# Altium PCB buoys_pcb.PcbDoc
Units mm, origin at the board's own origin, x right, y up, seen from the top; angles counter-clockwise.
Board outline 69 x 56 mm, 2 copper layers (Top Layer, Bottom Layer); 76 components, 36 nets, 244 pads, 68 vias.
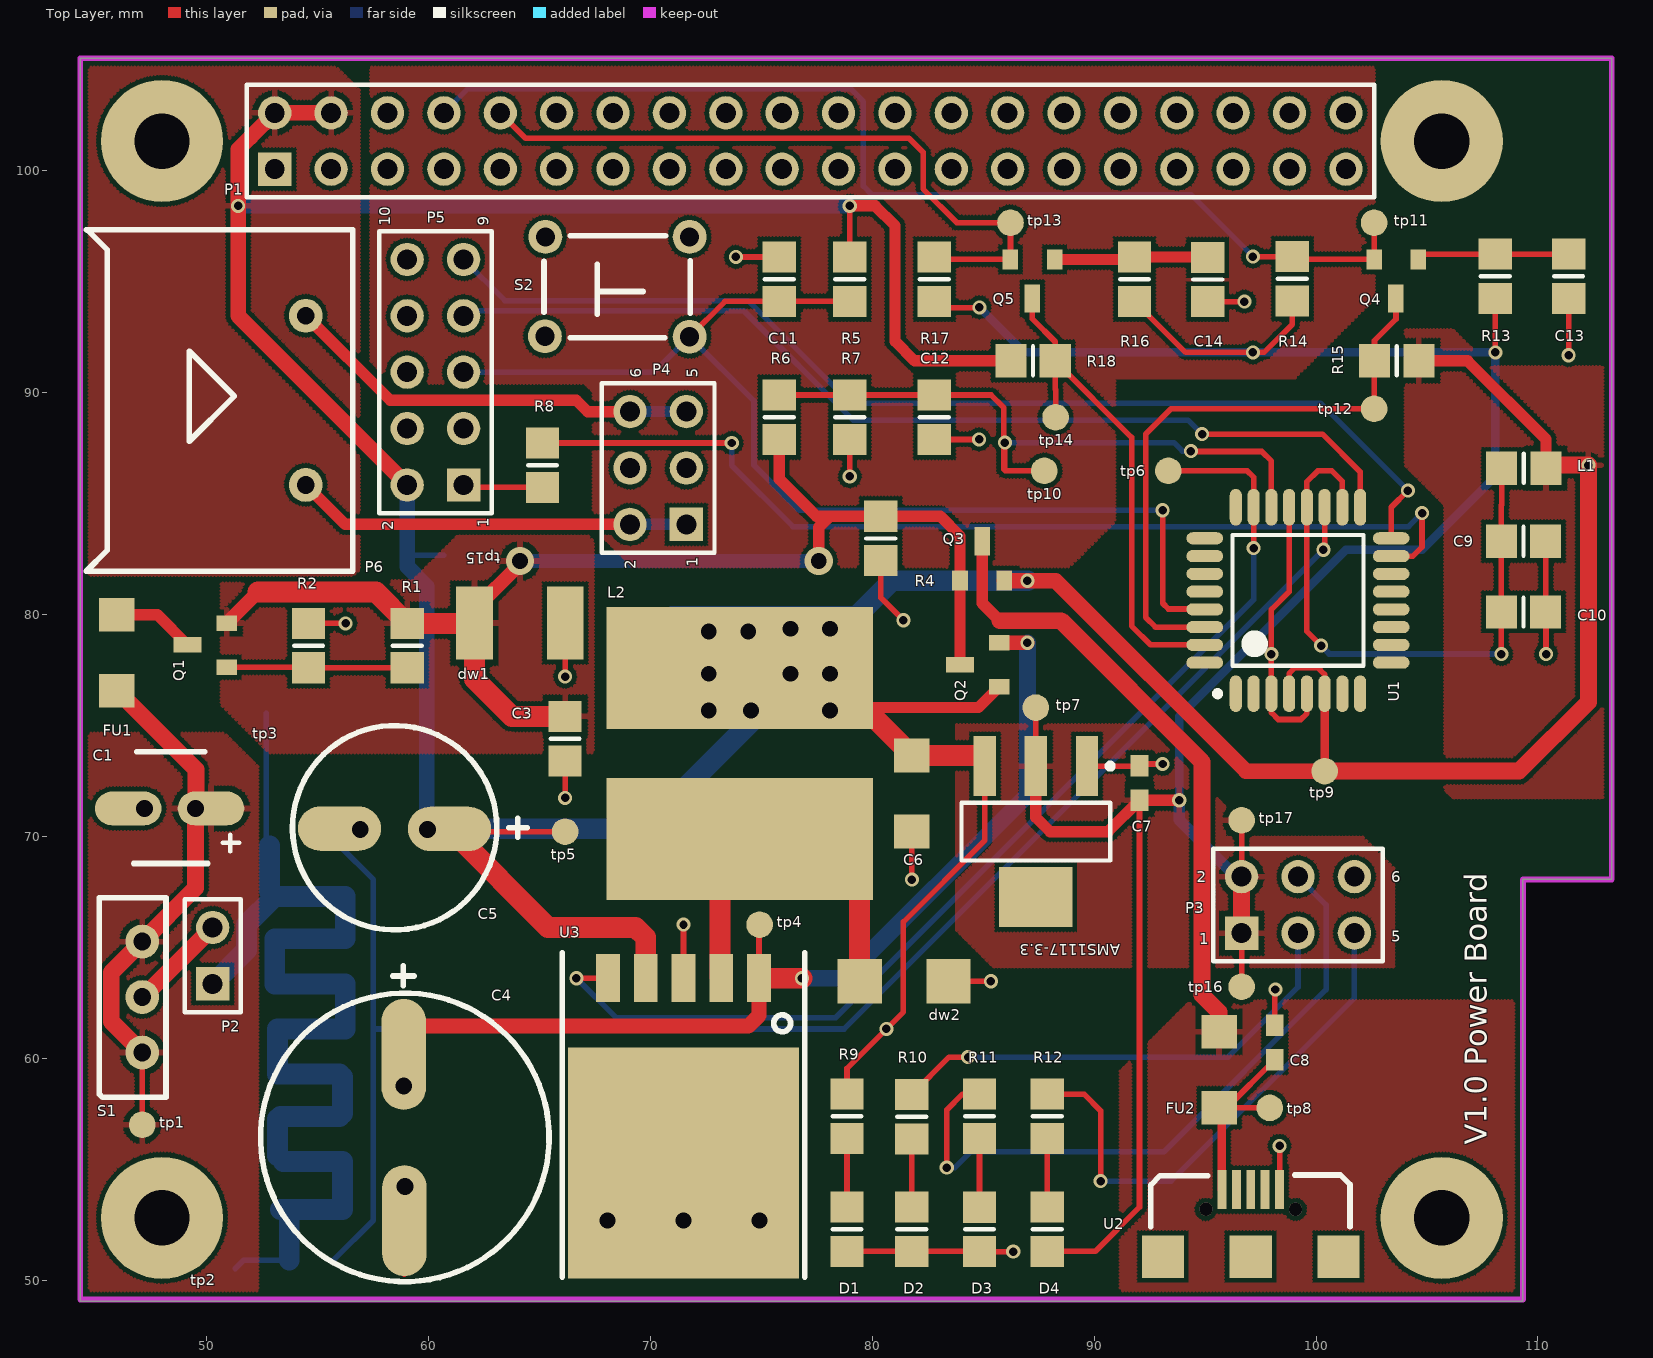
[diagram p0: Top Layer view]
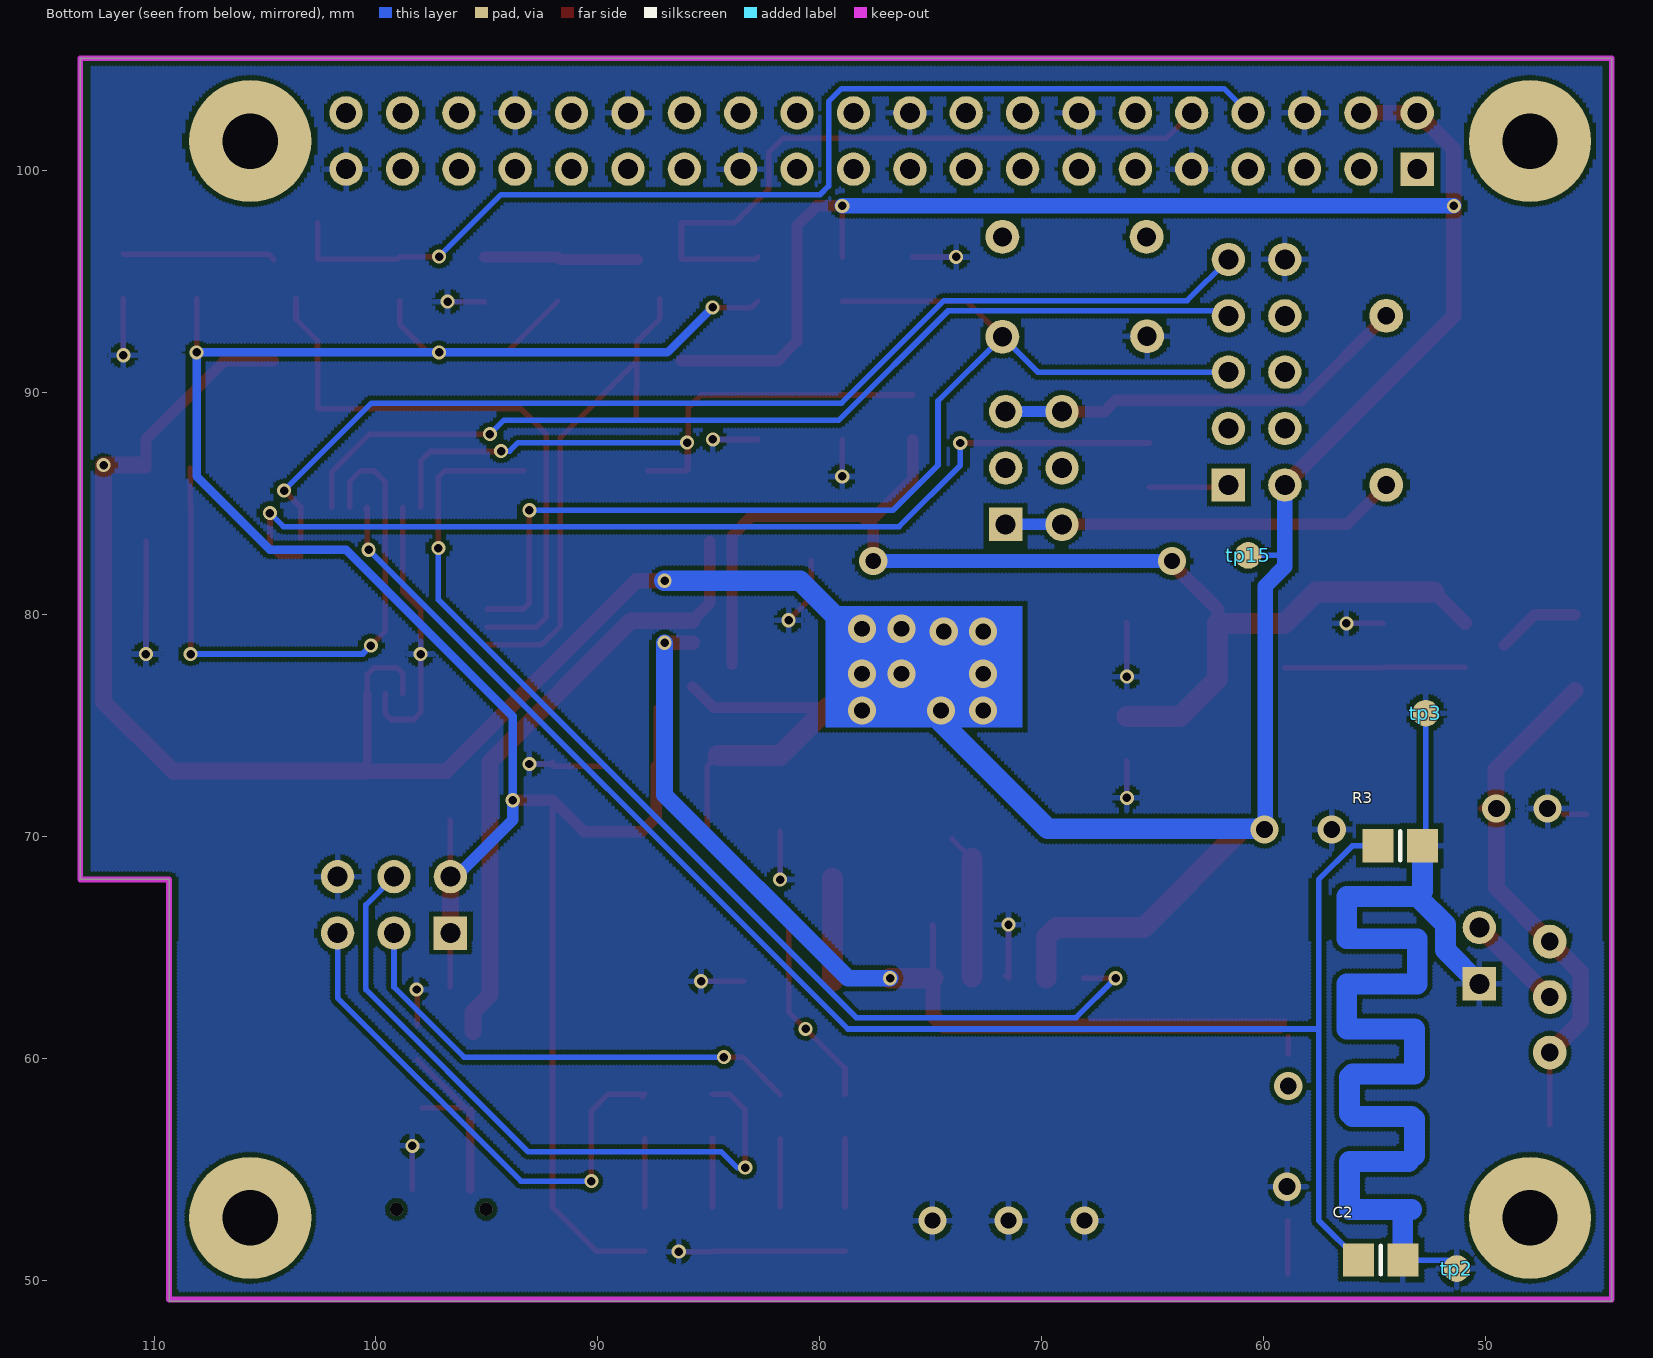
[diagram p1: Bottom Layer view, seen from below]

## Layer stack, top to bottom
Top Solder: solder mask 0.0102, Solder Resist, Dk 3.5
Top Layer: signal copper 0.0356
Dielectric 1: dielectric 0.32, FR-4, Dk 4.8
Bottom Layer: signal copper 0.0356
Bottom Solder: solder mask 0.0102, Solder Resist, Dk 3.5

## Board outline
44.323,49.075 109.323,49.075 109.323,68.075 113.323,68.075 113.323,105.075 44.323,105.075

## Design rules (kind name [scope] priority, off if disabled: settings)
Clearance [All] p1: gap=0.2
HoleToHoleClearance [All] p1: gap=0.2 allowstackedmicrovias=TRUE
PolygonConnect [All] p1: connectstyle=Relief reliefconductorwidth=0.254 reliefentries=4 polygonreliefangle="90 Angle" airgapwidth=0.254
RoutingVias [All] p1: holewidth=0.381 width=0.635 viastyle="Through Hole" minholewidth=0.381 minwidth=0.635 maxholewidth=0.635 maxwidth=1.27
SilkToSilkClearance [All] p1: silktosilkclearance=0.2
SolderMaskExpansion [All] p1: expansion=0.102
Width [All] p1: maxlimit=1 minlimit=0.2 preferedwidth=0.254
28 further rules are at their usual default settings.

## Components (designator, comment, footprint, x,y, rotation, side; value= is the part's Value field where it differs from the comment)
AMS1117-3.3 "Component_3" SOT223_M 87.376,70.231 r270 top
C1 "Cap Pol1" "5x5 C" 49.784,70.485 r180 top
C2 "Cap" 6-0805_M 54.737,50.927 r180 bottom
C3 "Cap" 6-0805_M 66.167,74.422 r270 top
C4 "Cap Pol2" "13x13 C" 55.858,63.065 r270 top locked
C5 "Cap Pol2" "8x8 C" 53.16,73.298 r180 top locked
C6 "Cap Pol2" 1206 81.818,73.71 r270 top
C7 "Cap Pol2" 0603 91.948,71.755 r90 top
C8 "Cap Pol2" 0603 98.044,60.071 r90 top
C9 "Cap" 6-0805_M 109.347,83.312 r180 top
C10 "Cap" 6-0805_M 109.347,80.122 r0 top
C11 "Cap" 6-0805_M 75.819,95.123 r90 top
C12 "Cap" 6-0805_M 82.804,88.9 r90 top
C13 "Cap" 6-0805_M 111.379,95.25 r90 top
C14 "Cap" 6-0805_M 95.123,95.107 r90 top
D1 "RED POWER" 6-0805_M 78.867,52.324 r270 top
D2 "RED" 6-0805_M 81.788,52.324 r270 top
D3 "BLUE" 6-0805_M 84.836,52.308 r270 top
D4 "ORANGE" 6-0805_M 87.884,52.324 r90 top
dw1 "SMBJ6.5A" SMBJ6.5A 66.237,79.589 r180 top
dw2 "1N5824" 1N5824 83.439,63.5 r180 top
FU1 "FUSE 3A" 1206 45.944,76.531 r90 top
FU2 "FUSE 3A" 1206 95.601,57.744 r90 top
L1 "Inductor" 6-0805_M 109.363,86.599 r0 top
L2 "Inductor" "12x12 L" 67.251,80.177 r90 top locked
P1 "Header 20X2" HDR2X20 53.086,100.076 r0 top locked
P2 "Header 2" HDR1X2 50.292,63.373 r90 top
P3 "Header 3X2" HDR2X3 96.647,65.659 r0 top locked
P4 "Header 3X2" HDR2X3 71.628,84.074 r90 top locked
P5 "Header 5X2" HDR2X5 61.595,85.852 r90 top locked
P6 "Header 2" tether 54.483,93.472 r270 top locked
Q1 "A19T" A19T 49.152,78.635 r90 top
Q2 "A19T" A19T 83.95,77.746 r90 top
Q3 "A19T" A19T 84.953,83.322 r0 top
Q4 "2N7002" 2N7002 95.69,211.847 r180 top
Q5 "2N7002" 2N7002 79.307,211.847 r180 top
R1 "Res1" 6-0805_M 59.055,78.613 r270 top
R2 "Res1" 6-0805_M 54.61,78.613 r270 top
R3 "Res1" 6-0805_M 53.848,69.596 r180 bottom
R4 "Res1" 6-0805_M 80.391,83.439 r90 top
R5 "Res1" 6-0805_M 78.994,95.123 r90 top
R6 "Res1" 6-0805_M 75.819,88.9 r270 top
R7 "Res1" 6-0805_M 78.994,88.9 r90 top
R8 "Res1" 6-0805_M 65.151,86.741 r90 top
R9 "Res1" 6-0805_M 78.867,57.404 r90 top
R10 "Res1" 6-0805_M 81.788,57.388 r90 top
R11 "Res1" 6-0805_M 84.836,57.404 r90 top
R12 "Res1" 6-0805_M 87.884,57.404 r90 top
R13 "Res1" 6-0805_M 108.077,95.25 r270 top
R14 "Res1" 6-0805_M 98.933,95.139 r270 top
R15 "Res1" 6-0805_M 103.632,91.44 r0 top
R16 "Res1" 6-0805_M 91.821,95.123 r270 top
R17 "Res1" 6-0805_M 82.804,95.123 r270 top
R18 "Res1" 6-0805_M 87.249,91.44 r180 top
S1 "sw" switch-2 47.117,65.288 r270 top
S2 "SW-PB" switch4 71.788,96.998 r180 top
tp1 "testpoint" tp#1 47.117,57.023 r0 top
tp2 "testpoint" tp#2 51.308,50.546 r0 top
tp3 "testpoint" tp#2 52.705,75.565 r0 top
tp4 "testpoint" tp#1 74.93,66.04 r90 top
tp5 "testpoint" tp#1 66.167,70.231 r0 top
tp6 "testpoint" tp#1 93.345,86.487 r0 top
tp7 "testpoint" tp#1 87.376,75.819 r90 top
tp8 "testpoint" tp#1 97.917,57.785 r0 top
tp9 "testpoint" tp#1 100.387,72.955 r0 top
tp10 "testpoint" tp#1 87.757,86.487 r90 top
tp11 "testpoint" tp#1 102.616,97.663 r90 top
tp12 "testpoint" tp#1 102.616,89.281 r90 top
tp13 "testpoint" tp#1 86.233,97.663 r90 top
tp14 "testpoint" tp#1 88.265,88.9 r90 top
tp15 "testpoint" tp#2 60.706,82.677 r270 top
tp16 "testpoint" tp#1 96.647,63.246 r90 top
tp17 "testpoint" tp#1 96.647,70.739 r90 top
U1 "ATmega8A-AU" 32A_N 99.187,80.645 r90 top locked
U2 "microUSB" microUSB 95.758,54.102 r0 top locked
U3 "LM2596S-5" LM2596 71.501,61.595 r90 top locked

## Footprints (in the part's own frame and the unit in brackets; to place one, negate y for a bottom-side part, rotate by r counter-clockwise, add the part's x,y. Pads: shape width x height; smd on the part's side, far side on the other; paste and mask are expansions set on the pad)
1N5824 [mm]
  rect 2x2 smd: A(0,0.01) K(4,0.01)
2N7002 [mm]
  rect 0.7x0.915 smd: 1(-8.914,115.837) 3(-6.926,115.835)
  rect 0.7x1.27 smd: 2(-7.91,117.6)
"5x5 C" [mm]
  oval 3x1.524 smd: 1(-0.43,-0.79) 2(3.3,-0.79)
  silkscreen extent -1.7,-3.35 3.05,1.69
6-0805_M [mm] "Chip Resistor, Body 2.0x1.2mm, IPC Low Density"
  rect 1.4x1.5 smd: 1(-1,0) 2(1,0)
  silkscreen extent 0,-0.65 0,0.65, body extent -1.07,-0.7 1.07,0.7, height 0.7
"8x8 C" [mm]
  oval 3.75x2 smd: 1(-7.8,2.94) 2(-2.84,2.93)
  silkscreen extent -11.3,-1.71 -0.73,7.49
"12x12 L" [mm]
  rect 5.5x12 smd: 1(-10.27,-6.79) 2(-2.58,-6.79)
"13x13 C" [mm]
  oval 5x2 smd: 1(2.87,3.04) 2(10.36,3.07)
  silkscreen extent -1.13,-3.41 13.11,9.59
32A_N [mm] "Thin QFP, 32-Leads, Body 7x7mm, Pitch 0.8mm, IPC Medium Density"
  oval 1.65x0.55 smd: 1(-4.2,2.8) 2(-4.2,2) 3(-4.2,1.2) 4(-4.2,0.4) 5(-4.2,-0.4) 6(-4.2,-1.2) 7(-4.2,-2) 8(-4.2,-2.8) 17(4.2,-2.8) 18(4.2,-2) 19(4.2,-1.2) 20(4.2,-0.4) 21(4.2,0.4) 22(4.2,1.2) 23(4.2,2) 24(4.2,2.8)
  oval 0.55x1.65 smd: 9(-2.8,-4.2) 10(-2,-4.2) 11(-1.2,-4.2) 12(-0.4,-4.2) 13(0.4,-4.2) 14(1.2,-4.2) 15(2,-4.2) 16(2.8,-4.2) 25(2.8,4.2) 26(2,4.2) 27(1.2,4.2) 28(0.4,4.2) 29(-0.4,4.2) 30(-1.2,4.2) 31(-2,4.2) 32(-2.8,4.2)
  silkscreen extent -4.32,-2.95 2.95,3.75, body extent -3.5,-3.5 3.5,3.5, height 1.2
0603 [mm]
  rect 0.965x0.8 smd: 1(-0.11,-0.1) 2(1.445,-0.1)
1206 [mm]
  rect 1.52x1.6 smd: 1(0.05,-0.03) 2(3.47,-0.03)
A19T [mm]
  rect 0.7x0.915 smd: 1(-0.994,-1.773) 3(0.994,-1.775)
  rect 0.7x1.27 smd: 2(0.01,-0.01)
HDR1X2 [mm] "Connector; Header; 2 Position"
  rect 1.5x1.5 hole 0.9: 1(0,0)
  round 1.5 hole 0.9: 2(2.54,0)
  silkscreen extent -1.27,-1.27 3.81,1.27
HDR2X3 [mm] "Connector; Header; 3x2 Position"
  rect 1.5x1.5 hole 0.9: 1(0,0)
  round 1.5 hole 0.9: 2(0,2.54) 3(2.54,0) 4(2.54,2.54) 5(5.08,0) 6(5.08,2.54)
  silkscreen extent -1.27,-1.27 6.35,3.81
HDR2X5 [mm] "Connector; Header; 5x2 Position"
  rect 1.5x1.5 hole 0.9: 1(0,0)
  round 1.5 hole 0.9: 2(0,2.54) 3(2.54,0) 4(2.54,2.54) 5(5.08,0) 6(5.08,2.54) 7(7.62,0) 8(7.62,2.54) 9(10.16,0) 10(10.16,2.54)
  silkscreen extent -1.27,-1.27 11.43,3.81
HDR2X20 [mm] "Connector; Header; 20x2 Position"
  rect 1.5x1.5 hole 0.9: 1(0,0)
  round 1.5 hole 0.9: 2(0,2.54) 3(2.54,0) 4(2.54,2.54) 5(5.08,0) 6(5.08,2.54) 7(7.62,0) 8(7.62,2.54) 9(10.16,0) 10(10.16,2.54) 11(12.7,0) 12(12.7,2.54) 13(15.24,0) 14(15.24,2.54) 15(17.78,0) 16(17.78,2.54) 17(20.32,0) 18(20.32,2.54) 19(22.86,0) 20(22.86,2.54) 21(25.4,0) 22(25.4,2.54) 23(27.94,0) 24(27.94,2.54) 25(30.48,0) 26(30.48,2.54) 27(33.02,0) 28(33.02,2.54) 29(35.56,0) 30(35.56,2.54) 31(38.1,0) 32(38.1,2.54) 33(40.64,0) 34(40.64,2.54) 35(43.18,0) 36(43.18,2.54) 37(45.72,0) 38(45.72,2.54) 39(48.26,0) 40(48.26,2.54)
  silkscreen extent -1.27,-1.27 49.53,3.81
LM2596 [mm]
  rect 2.16x1.07 smd: 1(2.032,-3.4) 2(2.032,-1.7) 3(2.032,0) 3(2.032,0) 4(2.032,1.7) 5(2.032,3.4)
  rect 10.41x10.41 smd: 6(-6.298,0)
  silkscreen extent -11.43,-5.46 3.18,5.46
microUSB [mm]
  rect 0.4x1.75 smd: 1(0,0) 2(0.65,0) 3(1.3,0) 4(1.95,0) 5(2.6,0)
  rect 1.9x1.9 smd: 6(-2.65,-3.025) 7(1.3,-3.025) 8(5.25,-3.025)
  silkscreen extent -3.2,-1.68 5.77,0.66
SMBJ6.5A [mm]
  rect 1.65x3.3 smd: A(0.07,-0.04) K(4.15,-0.04)
SOT223_M [mm] "SOT223, 4-Leads, Body 6.5x3.5mm, Pitch 2.3mm, Lead Span 7mm, IPC Low Density"
  rect 2.7x1 smd: 1(-2.95,2.3) 2(-2.95,0) 3(-2.95,-2.3)
  rect 2.7x3.3 smd: 4(2.95,0)
  silkscreen extent -3.07,-3.35 1.3,3.48, body extent -1.85,-3.35 1.85,3.35, height 1.7
switch4 [mm]
  round 1.524 hole 0.862: 1(0.01,4.47) 2(6.53,4.45) 3(0.01,-0.03) 4(6.51,-0.03)
  silkscreen extent -0.02,-0.08 6.57,4.51
switch-2 [mil]
  round 60 hole 31.5: 1(98.82,0) 2(0.39,0) 3(197.24,0)
  silkscreen extent -78,-76 277,42
tether [mil]
  round 60 hole 31.5: 1(0,0) 2(300,0)
  silkscreen extent -153,-389 453,83
tp#1 [mm]
  round 1.2 smd: 1(0,0)
tp#2 [mm]
  round 1.2 smd far side: 1(0,0)

## Part data
C1: "Polarized Capacitor (Radial)"
C2 C3 C9 C10 C11 C12 C13 C14: "Capacitor"
C4 C5 C6 C7 C8: "Polarized Capacitor (Axial)"
D1 D2 D3 D4: library part LED2, "Typical RED, GREEN, YELLOW, AMBER GaAs LED"
dw1 dw2: library part DW
FU1 FU2: library part FUSE
P1: "Header, 20-Pin, Dual row"
P2 P6: "Header, 2-Pin"
P3 P4: "Header, 3-Pin, Dual row"
P5: "Header, 5-Pin, Dual row"
Q1 Q2 Q3: library part PMOS-2, "P-Channel Power MOSFET"
Q4 Q5: library part NMOS-2, "N-Channel Power MOSFET"
R1 R2 R3 R4 R5 R6 R7 R8 R9 R10 R11 R12 R13 R14 R15 R16 R17 R18: "Resistor"
S2: "Switch"
U1: "8-bit AVR Microcontroller, 2.7-5.5V, 16MHz, 8KB Flash, 512 Bytes EEPROM, 1KB SRAM, 32-pin TQFP, Industrial Grade (-40癈 to 85癈)"
U2: library part Component_1
U3: library part Component_2

## Free pads (board coordinates)
  round 5.5 hole 2.5: 0(48.006,101.346) 1(105.664,101.346) 2(105.664,52.832) 3(48.006,52.832)

## Via types
v1: diameter 0.635, hole 0.381, Top Layer to Bottom Layer, 45 vias
v2: diameter 1.27, hole 0.711, Top Layer to Bottom Layer, 15 vias
v3: diameter 1.27, hole 0.762, Top Layer to Bottom Layer, 6 vias
v4: diameter 0.6, hole 0.6, Top Layer to Bottom Layer, 2 vias

## Nets (pads, with @x,y where several pads share a name; then routed paths per layer and width w, separated by ;. In a path a pad name is that pad's centre, name@x,y a point inside that pad or via, vN(x,y) a via of type N, cw(c..) or ccw(c..) an arc to the next point about the centre after c; other vN are vias at no path point)
+5V: AMS1117-3.3.3 C5.1 C6.1 L1.2 L2.2 P1.2 P1.4 P5.2 Q2.1 Q3.3 R5.2 R9.2 R15.2 R18.2 tp5.1 tp9.1 tp15.1 U1.4 U1.6 U3.4 | length 224.5
  Top Layer w0.254: C5.1 61.087,70.231 tp5.1 ; L2.2@78.105,75.819 L2.2@79.629,75.819 ; R9.2 78.867,59.563 v1(80.645,61.341) 81.407,62.103 81.407,66.167 85.076,69.836 AMS1117-3.3.3 AMS1117-3.3.3@84.597,73.66 ; R5.2 v1(78.994,98.425) ; Q3.3 Q3.3@85.96,81.534 ; U1.4 98.787,77.349 99.06,77.622 100.076,77.622 100.387,77.311 U1.6 ; L1.2 L1.2@110.505,86.741
  Top Layer w0.381: tp9.1 U1.6
  Top Layer w0.508: v1(78.994,98.425) 80.137,98.425 81.026,97.536 81.026,92.329 81.915,91.44 R18.2 ; L2.2@79.629,75.819 84.79,75.819 Q2.1 ; R15.2 106.832,91.44 110.363,87.909 L1.2
  Top Layer w0.7: P1.4 P1.2 51.994,101.524 51.435,100.965 v1(51.435,98.425) 51.435,93.472 P5.2 ; Q3.3@85.96,81.534 v1(86.995,81.534) 88.265,81.534 96.844,72.955
  Top Layer w0.711: 96.844,72.955 tp9.1
  Top Layer w0.762: tp9.1 109.15,72.955 112.268,76.073 v1(112.268,86.741) L1.2@110.505,86.741
  Top Layer w0.94: C5.1@61.087,70.231 65.405,65.913 69.342,65.913 69.801,65.454 U3.4 ; L2.2@79.629,75.819 C6.1 AMS1117-3.3.3@84.597,73.66
  Bottom Layer w0.254: 59.055,82.677 tp15.1
  Bottom Layer w0.7: v1(51.435,98.425) v1(78.994,98.425) ; P5.2 59.055,82.677 59.055,82.169 59.944,81.28 v3@59.944,70.358
  Bottom Layer w0.94: v3@59.944,70.358 69.723,70.358 80.899,81.534 v1(86.995,81.534)
  other v2: 72.644,75.692 74.549,75.692 78.105,75.692 72.644,77.343 76.327,77.343 78.105,77.343 72.644,79.248 74.422,79.248 76.327,79.375 78.105,79.375
  other v3: 59.97,70.328
+V3.3: AMS1117-3.3.2 C7.1 D4.1 P3.1 P3.2 R13.2 R14.2 R16.2 R17.2 tp7.1 tp16.1 tp17.1 | length 114.9
  Top Layer w0.254: R17.2 83.09,93.837 84.836,93.837 v1(84.836,93.853) ; AMS1117-3.3.2 tp7.1 ; D4.1 90.059,51.324 92.048,53.313 C7.1 ; R16.2 94.123,91.821 v1(97.155,91.821) 97.663,91.821 98.933,93.091 R14.2 ; tp16.1 P3.1 ; P3.2 tp17.1 ; v1(108.077,91.821) R13.2
  Top Layer w0.508: AMS1117-3.3.2 87.376,70.866 88.011,70.231 90.634,70.231 C7.1 v1(93.836,71.645)
  Top Layer w0.762: P3.1 P3.2
  Bottom Layer w0.254: P3.2@96.393,68.199 P3.2 P3.2@96.647,68.834
  Bottom Layer w0.381: v1(84.836,93.853) 86.868,91.821 v1(97.155,91.821) v1(108.077,91.821) 108.077,86.233 104.775,82.931 101.346,82.931 93.836,75.421 v1(93.836,71.645)
  Bottom Layer w0.508: v1(93.836,71.645) 93.836,70.756 P3.2@96.393,68.199
AVR_RX: Q4.2 R15.1 tp12.1 U1.30 | length 27.2
  Top Layer w0.254: U1.30 92.767,79.445 92.329,79.883 92.329,88.138 93.472,89.281 tp12.1 102.616,91.424 R15.1 102.632,92.354 103.6,93.323 Q4.2
AVR_TX: Q5.2 R18.1 tp14.1 U1.31 | length 22.8
  Top Layer w0.254: Q5.2 87.217,93.335 88.249,92.304 R18.1 ; tp14.1 88.265,90.145 88.249,90.161 R18.1 ; U1.31 92.551,78.645 91.694,79.502 91.694,87.995 R18.1
BCURRENT: C2.1 R3.1 U1.19 | length 75
  Top Layer w0.254: v1(100.33,82.931) 100.387,82.988 U1.19 U1.19@100.457,84.775
  Bottom Layer w0.254: R3.1 56.007,69.596 57.531,68.072 57.531,61.341 ; C2.1 57.531,52.721 57.531,61.341 ; v1(100.33,82.931) 78.74,61.341 57.531,61.341
GND: AMS1117-3.3.1 C1.2 C2.2 C3.2 C4.2 C5.2 C6.2 C7.2 C8.2 C9.1 C10.2 C11.2 C12.1 C13.1 C14.1 D1.2 D2.2 D3.2 dw1.A dw2.A P1.6 P1.9 P1.14 P1.20 P1.25 P1.30 P1.34 P1.39 P2.1 P3.6 P5.10 R2.1 R3.2 R4.1 R7.1 S2.2 tp2.1 tp3.1 U1.3 U1.5 U1.21 U2.5 U3.3 U3.6 | length 117.3
  Top Layer w0.254: C1.2@45.466,71.021 C1.2@46.484,71.021 ; R2.1 v1(56.277,79.613) ; C4.2@58.928,50.292 C4.2 ; C3.2 66.167,71.787 v1@66.199,71.755 ; v1(66.167,77.216) dw1.A ; v1(71.501,66.04) 71.501,63.627 U3.3@71.614,63.74 ; v1(73.858,96.123) C11.2 ; D1.2 D2.2 84.82,51.324 D3.2 v1(86.36,51.308) ; v1(78.994,86.233) R7.1 ; R4.1 80.391,80.772 v1(81.407,79.756) ; v1(81.788,68.072) C6.2 ; C12.1 v1(84.82,87.9) ; dw2.A v1(85.354,63.49) ; AMS1117-3.3.1 92.029,73.181 C7.2 92.048,73.379 92.148,73.279 v1(93.091,73.279) ; C14.1 v1(96.774,94.107) ; C8.2 98.144,63.092 v1(98.171,63.119) ; U2.5 v1(98.358,56.074) ; U1.21 98.787,81.039 97.987,80.239 v1(97.987,78.232) U1.3 97.987,75.597 98.298,75.286 99.314,75.286 99.587,75.559 U1.5 ; C9.1 C10.2 110.363,80.106 v1(110.363,78.232) ; v1(111.379,91.694) C13.1
  Bottom Layer w0.254: tp2.1 51.689,50.927 C2.2 ; tp3.1 52.705,69.739 R3.2 ; 52.848,67.548 53.086,67.31 ; 53.213,55.626 53.467,55.372 ; 53.213,57.277 53.34,57.404 ; 53.34,53.213 53.737,52.816 ; 56.007,57.404 56.134,57.531 ; 56.007,59.309 56.134,59.182
  Bottom Layer w0.94: P2.1 51.816,64.897 51.816,66.04 53.086,67.31 56.261,67.31 56.261,65.405 53.086,65.405 53.086,63.373 56.261,63.373 56.261,61.341 53.213,61.341 53.213,59.309 56.007,59.309 ; 52.848,67.548 R3.2 ; 53.213,55.626 53.213,57.277 ; 53.34,53.213 56.134,53.213 56.134,55.372 53.467,55.372 ; 53.34,57.404 56.007,57.404 ; C2.2 53.737,52.816 ; 56.134,57.531 56.134,59.182
  other v1: 66.167,71.755
  other v2: 68.072,52.705 71.501,52.705 74.93,52.705
  other v3: 58.948,54.235 56.94,70.328 47.214,71.275
MISO: P5.9 U1.16 | length 49.3
  Top Layer w0.254: U1.16 103.387,84.845 v1(104.14,85.598)
  Bottom Layer w0.254: P5.9 63.452,94.155 74.407,94.155 79.026,89.535 100.203,89.535 v1(104.14,85.598)
MOSI: R8.2 U1.15 | length 45.1
  Top Layer w0.254: R8.2 v1(73.676,87.741) ; U1.15 104.362,82.645 104.775,83.058 v1(104.775,84.582)
  Bottom Layer w0.254: v1(73.676,87.741) 73.676,86.725 76.429,83.972 104.165,83.972 v1(104.775,84.582)
NetC8_1: C8.1 FU2.1 tp8.1 U2.1 | length 8.8
  Top Layer w0.254: FU2.1@95.758,57.667 95.85,57.667 FU2.1@95.977,57.794 ; tp8.1 97.908,57.794 FU2.1@95.977,57.794 ; C8.1 FU2.1@95.977,57.794
  Top Layer w0.381: U2.1 FU2.1@95.758,57.667
NetC9_2: C9.2 C10.1 L1.1 U1.18 U1.20 | length 27.5
  Top Layer w0.254: v1(100.228,78.613) 99.587,79.254 U1.20 99.587,85.998 100.076,86.487 100.711,86.487 101.187,86.011 U1.18 ; v1(108.347,78.232) C10.1 C9.2 108.347,84.938 108.363,84.954 L1.1
  Bottom Layer w0.254: v1(100.228,78.613) 100.597,78.245 100.584,78.232 v1(108.347,78.232)
NetC13_2: C13.2 Q4.1 R13.1 | length 6.9
  Top Layer w0.254: Q4.1 104.845,96.25 R13.1 C13.2
NetC14_2: C14.2 Q5.1 R16.1 | length 7
  Top Layer w0.254: R16.1@91.708,96.01 R16.1 ; C14.2@95.107,96.123 C14.2
  Top Layer w0.5: Q5.1 R16.1@91.708,96.01 ; R16.1 C14.2@95.107,96.123
NetD1_1: D1.1 R9.1 | length 3.1
  Top Layer w0.254: D1.1 R9.1
NetD2_1: D2.1 R10.1 | length 3.1
  Top Layer w0.254: D2.1 R10.1
NetD3_1: D3.1 R11.1 | length 3.1
  Top Layer w0.254: D3.1 R11.1
NetD4_2: D4.2 R12.1 | length 3.1
  Top Layer w0.254: D4.2 R12.1
Netdw2_K: dw2.K L2.1 U3.2 | length 11.3
  Top Layer w0.254: U3.2@73.152,63.676 U3.2 ; L2.1@73.152,69.018 L2.1
  Top Layer w0.94: U3.2@73.152,63.676 L2.1@73.152,69.018 ; dw2.K L2.1@79.439,68.136
NetFU1_2: FU1.2 Q1.2 | length 3.7
  Top Layer w0.508: FU1.2 47.806,80.001 Q1.2
NetP2_2: P2.2 S1.1 | length 4.5
  Top Layer w0.254: S1.1 S1.1@47.157,62.778
  Top Layer w0.762: S1.1@47.157,62.778 P2.2
NetP3_5: P3.5 R12.2 | length 23.8
  Top Layer w0.254: R12.2@87.995,58.293 R12.2 89.551,58.404 90.297,57.658 v1(90.297,54.483)
  Bottom Layer w0.254: v1(90.297,54.483) 93.472,54.483 101.727,62.738 P3.5
NetP5_1: P5.1 R8.1 | length 3.6
  Top Layer w0.254: P5.1 61.706,85.741 R8.1
NetQ1_1: Q1.1 R1.2 R2.2 | length 8.1
  Top Layer w0.254: Q1.1 54.582,77.641 R2.2 R1.2
PI_RX: P1.10 Q5.3 R17.1 tp13.1 | length 31.1
  Top Layer w0.254: P1.10 64.389,101.473 81.661,101.473 82.296,100.838 82.296,99.187 83.82,97.663 tp13.1 Q5.3 82.915,96.012 R17.1
PI_TX: P1.8 Q4.3 R14.1 tp11.1 | length 49.4
  Top Layer w0.254: v1(97.155,96.139) R14.1 99.06,96.012 Q4.3 tp11.1
  Bottom Layer w0.254: P1.8 61.798,103.708 79.019,103.708 79.604,103.124 79.604,99.314 79.985,98.933 94.361,98.933 v1(97.155,96.139)
PLC: P3.3 R10.2 | length 21.8
  Top Layer w0.254: R10.2 83.471,60.071 v1(84.328,60.071)
  Bottom Layer w0.254: v1(84.328,60.071) 96.034,60.071 99.187,63.224 P3.3
R_ONOFF: tp6.1 U1.23 U3.5 | length 50
  Top Layer w0.254: v1(66.675,63.627) U3.5 U3.5@68.072,63.656 ; tp6.1 96.901,86.487 97.187,86.201 U1.23 v1(97.187,83.007)
  Bottom Layer w0.254: v1(66.675,63.627) 68.453,61.849 78.359,61.849 97.187,80.677 v1(97.187,83.007)
RESET: C11.1 P5.5 R5.1 S2.1 U1.29 | length 51.2
  Top Layer w0.254: S2.1 73.373,94.123 C11.1 R5.1 ; v1(93.091,84.709) 93.091,80.518 93.345,80.264 94.968,80.264 U1.29
  Bottom Layer w0.254: P5.5 70.182,90.932 S2.1 74.676,89.63 74.676,86.741 76.708,84.709 v1(93.091,84.709)
SCK: P5.7 U1.17 | length 45.1
  Top Layer w0.254: v1(94.869,88.138) 100.293,88.138 101.987,86.444 U1.17
  Bottom Layer w0.254: P5.7 61.824,93.701 74.219,93.701 79.146,88.773 94.234,88.773 v1(94.869,88.138)
TETHERA: P4.1 P4.2 P6.2 | length 17.9
  Top Layer w0.508: P6.2 56.261,84.074 P4.2
  Bottom Layer w0.508: P4.2 P4.1
TETHERB: P4.5 P4.6 P6.1 | length 18.9
  Top Layer w0.508: P6.1 58.293,89.662 66.675,89.662 67.183,89.154 P4.6
  Bottom Layer w0.254: P4.6 P4.6@69.095,89.161 ; P4.5@71.621,89.161 P4.5
  Bottom Layer w0.508: P4.6@69.095,89.161 P4.5@71.621,89.161
TP: P3.4 R11.2 | length 30.4
  Top Layer w0.254: v1(83.363,55.093) 83.363,57.693 84.074,58.404 R11.2
  Bottom Layer w0.254: v1(83.363,55.093) 83.73,55.093 84.438,55.801 93.139,55.801 100.457,63.119 100.457,66.929 P3.4
UBAT: C12.2 R6.1 R7.2 tp10.1 U1.22 | length 30.6
  Top Layer w0.254: R6.1 R7.2 C12.2 85.36,89.9 85.928,89.332 85.928,86.563 ; v1(85.979,87.757) 85.979,86.614 85.928,86.563 ; tp10.1 86.004,86.487 85.928,86.563 ; v1(94.361,87.376) 94.469,87.376 94.488,87.357 97.555,87.357 97.987,86.925 U1.22
  Bottom Layer w0.254: v1(85.979,87.757) 93.599,87.757 93.98,87.376 v1(94.361,87.376)
VBAT: C1.1 FU1.1 S1.2 S1.3 tp1.1 | length 22.8
  Top Layer w0.254: tp1.1 S1.3 ; C1.1@49.53,71.959 C1.1
  Top Layer w0.762: FU1.1 49.53,73.025 C1.1@49.53,71.959 ; S1.3 45.72,61.675 45.72,63.881 S1.2 49.524,67.685 C1.1@49.524,70.585
  other v3: 49.524,71.275
VIN: C3.1 dw1.K Q1.3 Q2.2 Q3.1 R1.1 R4.2 R6.2 | length 56.1
  Top Layer w0.254: dw1.K dw1.K@62.087,80.248 ; v2@64.135,82.296 v2(64.135,82.423) ; C3.1@65.897,75.692 C3.1 ; Q2.2@83.959,77.757 Q2.2
  Top Layer w0.508: R6.2 75.819,86.106 77.486,84.439 78.089,84.439 ; v2(77.597,82.423) 77.597,83.947 78.089,84.439 ; Q2.2@83.959,77.757 Q3.1 83.959,83.554 83.074,84.439 R4.2 78.089,84.439
  Top Layer w0.635: Q1.3 52.324,81.026 ; dw1.K@62.087,80.248 v2@64.135,82.296
  Top Layer w0.94: 52.324,81.026 57.642,81.026 R1.1 dw1.K@62.071,79.613 ; dw1.K 62.087,77.105 63.77,75.422 C3.1
  Bottom Layer w0.635: v2(64.135,82.423) v2(77.597,82.423)
VIN0: C4.1 Q2.3 tp4.1 U3.1 | length 44.7
  Top Layer w0.254: C4.1 C4.1@58.898,60.985 ; C4.1@59.055,61.718 C4.1@59.305,61.468 ; U3.1 74.901,66.011 tp4.1
  Top Layer w0.635: Q2.3 v1(86.995,78.74)
  Top Layer w0.686: C4.1@59.305,61.468 74.422,61.468 74.901,61.947 U3.1
  Top Layer w0.94: U3.1 v1(76.835,63.627)
  Bottom Layer w0.762: v1(76.835,63.627) 78.74,63.627 86.995,71.882 v1(86.995,78.74)
  other v3: 58.898,58.765
VUSB: FU2.2 Q3.2 | length 28.1
  Top Layer w0.508: Q3.2 84.963,80.518 85.75,79.731
  Top Layer w0.762: 85.75,79.731 88.519,79.731 94.869,73.381 94.869,62.865 95.631,62.103 FU2.2
pads on no net: AMS1117-3.3.4 P1.1 P1.3 P1.5 P1.7 P1.11 P1.12 P1.13 P1.15 P1.16 P1.17 P1.18 P1.19 P1.21 P1.22 P1.23 P1.24 P1.26 P1.27 P1.28 P1.29 P1.31 P1.32 P1.33 P1.35 P1.36 P1.37 P1.38 P1.40 P4.3 P4.4 P5.3 P5.4 P5.6 P5.8 S2.3 S2.4 U1.1 U1.2 U1.7 U1.8 U1.9 U1.10 U1.11 U1.12 U1.13 U1.14 U1.24 U1.25 U1.26 U1.27 U1.28 U1.32 U2.2 U2.3 U2.4 U2.6 U2.7 U2.8
copper on no net:
  other v4: 95.039,53.213 99.077,53.213

## Polygon pours and split planes (outlines as drawn)
VUSB on Top Layer "vusb-1" (hatched 90Degree grid 0 track 0.152, pour order 10): 109.323,62.611 94.361,62.611 93.091,61.341 91.186,59.436 91.186,49.149 109.323,49.149 109.323,62.611
VBAT on Top Layer "vbat-1" (hatched 90Degree grid 0 track 0.152, pour order 12): 44.323,74.676 50.8,74.676 52.07,73.406 52.324,73.152 52.324,49.149 44.323,49.149 44.323,74.676
+5V on Top Layer "v5v-1" (hatched 90Degree grid 0 track 0.152, pour order 14): 44.323,105.075 55.453,105.075 55.626,104.902 56.896,103.632 56.896,102.743 56.896,82.042 56.769,81.915 56.642,81.788 44.323,81.788 44.323,105.075
+5V on Top Layer "5v-2" (hatched 90Degree grid 0 track 0.152, pour order 18): 113.323,91.186 107.823,91.186 106.299,92.71 106.172,92.837 104.013,92.837 104.013,86.741 105.791,84.963 105.791,77.089 105.791,72.136 106.172,71.755 113.323,71.755 113.323,91.186
VIN on Top Layer "vin-1" (hatched 90Degree grid 0 track 0.152, pour order 20): 50.673,81.534 58.801,81.534 59.309,81.534 61.595,83.82 65.532,83.82 66.929,83.82 67.437,83.312 67.437,73.787 52.832,73.787 50.673,75.946 50.673,81.534
+V3.3 on Top Layer "v3.3-1" (hatched 90Degree grid 0 track 0.152, pour order 22): 83.82,75.057 92.202,75.057 95.885,71.374 95.885,69.977 102.108,69.977 103.505,68.58 103.505,64.135 85.471,64.135 83.82,65.786 83.82,75.057
no net on Top Layer "nonet-1" (hatched 90Degree grid 0 track 0.152, pour order 24): 57.404,105.075 57.404,91.44 58.42,90.424 67.056,90.424 67.437,90.043 67.437,84.709 67.437,83.947 69.088,82.296 69.215,82.169 73.787,82.169 88.9,82.169 90.805,84.074 90.932,84.201 90.932,90.678 99.06,90.678 102.362,93.98 102.616,94.234 102.616,105.075 57.404,105.075
GND on Bottom Layer "gnd-1" (hatched 90Degree grid 0 track 0.152, pour order 16): 44.323,105.075 113.323,105.075 113.323,68.075 109.323,68.075 109.323,49.149 44.323,49.149 44.323,105.075

## Keep-outs
Keep-Out Layer:
  lines w0.254: 44.323,49.149 44.323,105.075 113.323,105.075 113.323,68.075 109.323,68.075 109.323,49.149 44.323,49.149

## Other copper
Bottom Layer:
  rectangle net +5V: 70.866,74.93 79.756,80.391

## Silkscreen, mask and mechanical layers (free items; w line width, h text height)
Top Overlay:
  text "V1.0 Power Board" at 107.696,56.134 h1 r90

## Text inside footprints (layer, text, board x,y; h text height)
P3: Top Overlay "1" at 94.742,65.151 h0.5; Top Overlay "2" at 94.615,67.945 h0.5; Top Overlay "5" at 103.378,65.278 h0.5; Top Overlay "6" at 103.378,67.945 h0.5
P4: Top Overlay "1" at 72.136,82.169 h0.5 r90; Top Overlay "2" at 69.342,82.042 h0.5 r90; Top Overlay "5" at 72.136,90.678 h0.5 r90; Top Overlay "6" at 69.596,90.678 h0.5 r90
P5: Top Overlay "2" at 58.42,83.82 h0.5 r90; Top Overlay "1" at 62.738,83.947 h0.5 r90; Top Overlay "9" at 62.738,97.536 h0.5 r90; Top Overlay "10" at 58.293,97.536 h0.5 r90